# EAGLE board RoverBaseboard (EAGLE 6.4)
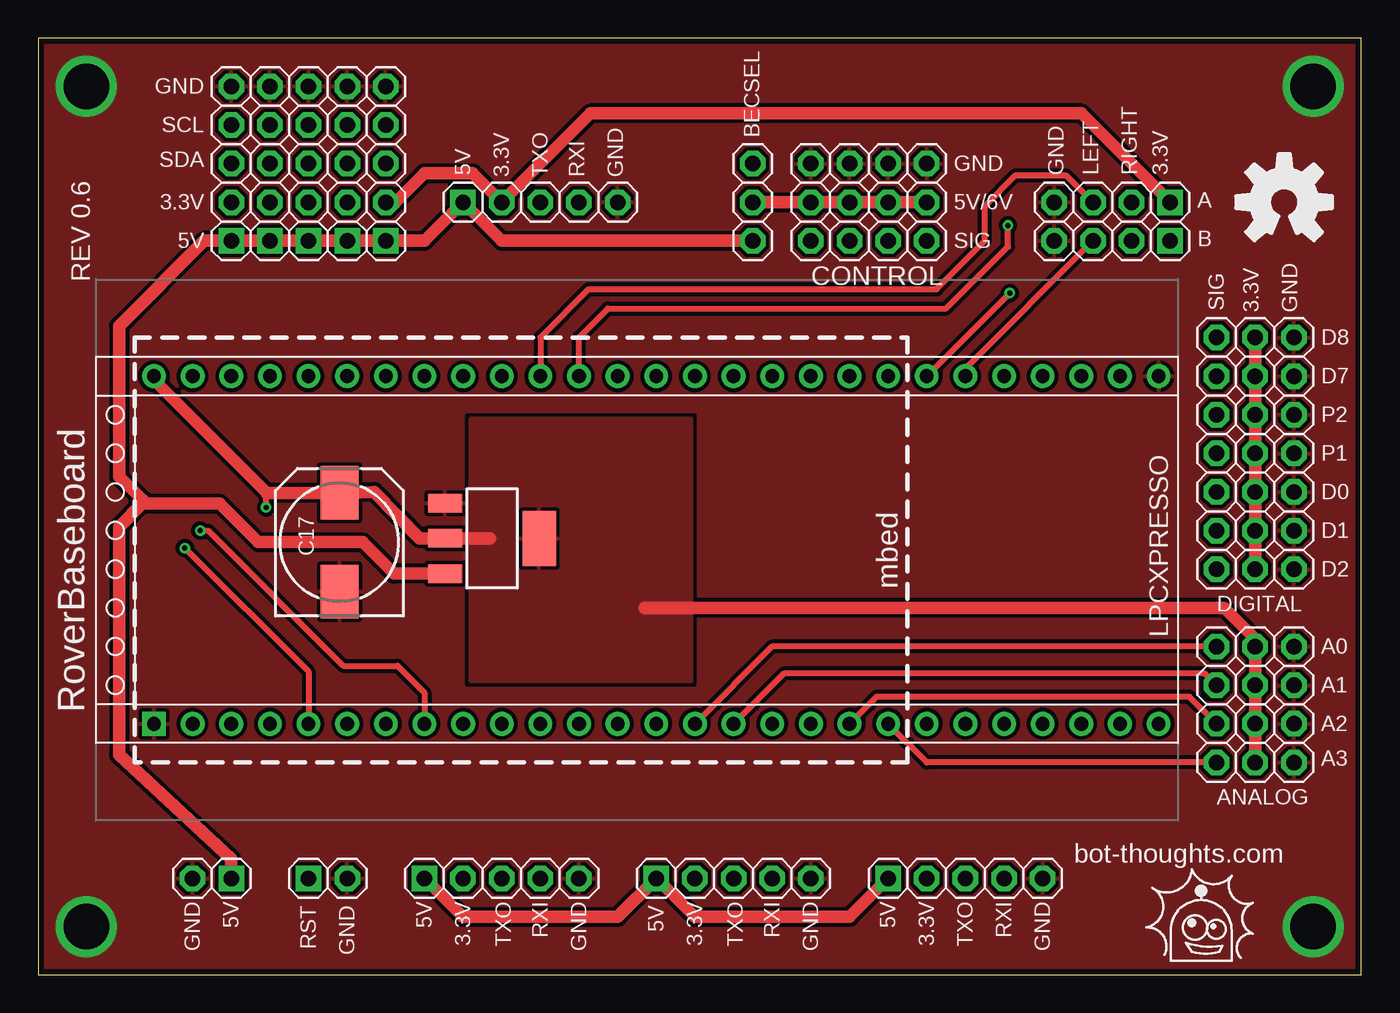
[diagram p0: board, top side]
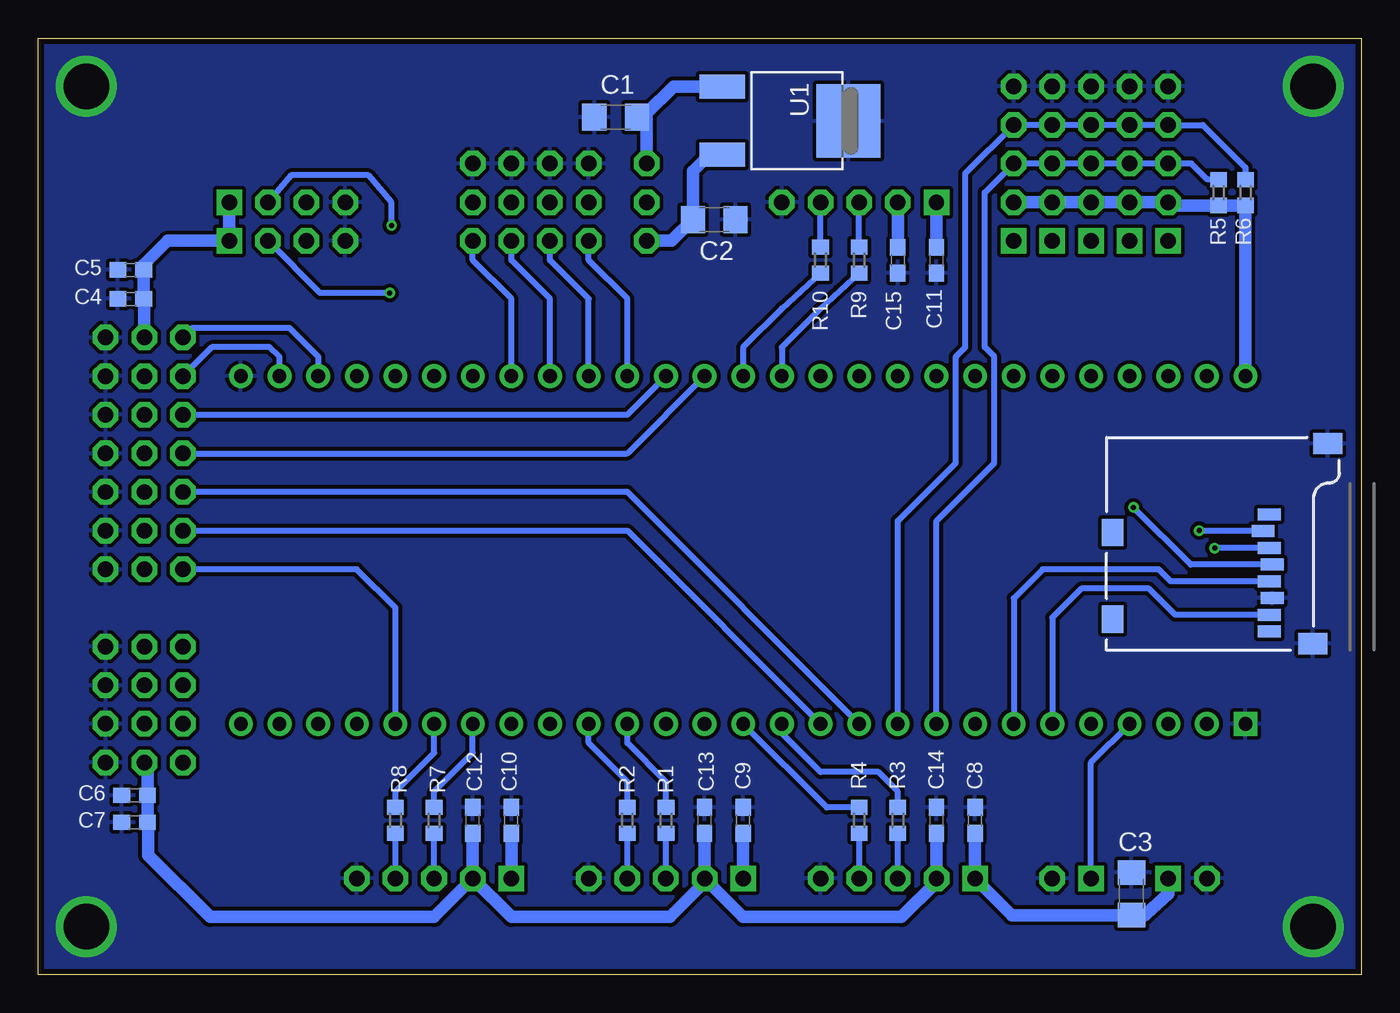
[diagram p1: board, bottom side, seen from below]

Size 87 x 61.59 mm. Coordinates in mm from the lower left corner, seen from the top.
Outline: 0,0 87,0 87,61.59 0,61.59 0,0
Copper layers (1*16): Top 0.0356mm / dielectric 1.5011mm / Bottom 0.0356mm
Design rules "default *": minimum track width 6mil, minimum drill 13mil, track to track 6mil, track to pad 6mil, pad to pad 6mil, via to via 6mil, smd to smd 6mil, copper to edge 15mil, drill to drill 6mil, minimum pad ring 13mil, minimum via ring 7mil, stop-mask expansion 4mil, vias tented up to drill 25mil, thermal gap 10mil

## Footprints (pad centres in the part's own frame; a part is rotated, then mirrored left to right if it is on the bottom)
1X03-S = drill 1.016 octagon: 1 -2.54,0; 2 0,0; 3 2.54,0
C1206 = smd 1.6 x 1.8: 1 -1.4,0; 2 1.4,0
C0603 = smd 1.1 x 1: 1 -0.85,0; 2 0.85,0
140CLH-0810 = smd 3.5 x 2.5: + 3.25,0; - -3.25,0
SOT223 = smd 1.219 x 2.235: 1 -2.311,-3.099; 2 0,-3.099; 3 2.311,-3.099 | smd 3.6 x 2.2: 4 0,3.099
1X04-S = drill 1.016 square: 1 -3.81,0 | drill 1.016 octagon: 2 -1.27,0; 3 1.27,0; 4 3.81,0
1X02-S = drill 1.016 square: 1 -1.27,0 | drill 1.016 octagon: 2 1.27,0
1X05-S = drill 1.016 square: 1 -5.08,0 | drill 1.016 octagon: 2 -2.54,0; 3 0,0; 4 2.54,0; 5 5.08,0
R0603 = smd 1 x 1.1: 1 -0.85,0; 2 0.85,0
DPAK = smd 1.6 x 2.997: 1 -2.261,-3.658; 3 2.21,-3.658 | smd 4.826 x 4.191: 4 0,4.623
MICRO-SD-SOCKET-PP = smd 0.8 x 1.5: 1 -8.94,10.7; 2 -7.84,10.3; 3 -6.74,10.7; 4 -5.64,10.9; 5 -4.54,10.7; 6 -3.44,10.9; 7 -2.34,10.7; 8 -1.24,10.7 | smd 1.8 x 1.4: CD1 -2.05,0.4; CD2 -7.75,0.4 | smd 1.4 x 1.9: GND1 -13.6,14.55; GND3 -0.45,13.55
LPCXPRESSO_NO_PAD = drill 0.9 pad 1.422 square: J6-1 -33.02,-11.43 | drill 0.9 pad 1.422: J6-2 -30.48,-11.43; J6-3 -27.94,-11.43; J6-4 -25.4,-11.43; J6-5 -22.86,-11.43; J6-6 -20.32,-11.43; J6-7 -17.78,-11.43; J6-8 -15.24,-11.43; J6-9 -12.7,-11.43; J6-10 -10.16,-11.43; J6-11 -7.62,-11.43; J6-12 -5.08,-11.43; J6-13 -2.54,-11.43; J6-14 0,-11.43; J6-15 2.54,-11.43; J6-16 5.08,-11.43; J6-17 7.62,-11.43; J6-18 10.16,-11.43; J6-19 12.7,-11.43; J6-20 15.24,-11.43; J6-21 17.78,-11.43; J6-22 20.32,-11.43; J6-23 22.86,-11.43; J6-24 25.4,-11.43; J6-25 27.94,-11.43; J6-26 30.48,-11.43; J6-27 33.02,-11.43; J6-28 -33.02,11.43; J6-29 -30.48,11.43; J6-30 -27.94,11.43; J6-31 -25.4,11.43; J6-32 -22.86,11.43; J6-33 -20.32,11.43; J6-34 -17.78,11.43; J6-35 -15.24,11.43; J6-36 -12.7,11.43; J6-37 -10.16,11.43; J6-38 -7.62,11.43; J6-39 -5.08,11.43; J6-40 -2.54,11.43; J6-41 0,11.43; J6-42 2.54,11.43; J6-43 5.08,11.43; J6-44 7.62,11.43; J6-45 10.16,11.43; J6-46 12.7,11.43; J6-47 15.24,11.43; J6-48 17.78,11.43; J6-49 20.32,11.43; J6-50 22.86,11.43; J6-51 25.4,11.43; J6-52 27.94,11.43; J6-53 30.48,11.43; J6-54 33.02,11.43

## Placement (x,y rotation side)
BECSEL  5V | 6V  [1X03-S]  46.99,50.8 270 top
C1  106  [C1206]  49.02,56.39 180 bottom
C2  106  [C1206]  42.55,49.66 0 bottom
C3  106  [C1206]  15.11,5.33 90 bottom
C4  106  [C0603]  80.9,44.45 180 bottom
C5  104  [C0603]  80.9,46.35 180 bottom
C6  106  [C0603]  80.64,11.81 180 bottom
C7  104  [C0603]  80.64,10.03 180 bottom
C8  106  [C0603]  25.4,10.16 90 bottom
C9  106  [C0603]  40.64,10.16 90 bottom
C10  106  [C0603]  55.88,10.16 90 bottom
C11  106  [C0603]  27.94,46.99 270 bottom
C12  106  [C0603]  58.42,10.16 90 bottom
C13  106  [C0603]  43.18,10.16 90 bottom
C14  106  [C0603]  27.94,10.16 90 bottom
C15  106  [C0603]  30.48,46.99 270 bottom
C17  33uF  [140CLH-0810]  19.81,28.45 90 top
IC3  3.3V  [SOT223]  29.84,28.7 270 top
JP1  IO  [1X03-S]  80.01,31.75 0 top
JP2  ENCODERS  [1X04-S]  70.61,48.26 180 top
JP3  POWER  [1X02-S]  11.43,6.35 180 top
JP4  RST  [1X02-S]  19.05,6.35 0 top
JP5  RXSPD  [1X03-S]  50.8,50.8 90 top
JP6  RXSTR  [1X03-S]  53.34,50.8 90 top
JP7  UART0  [1X05-S]  60.96,6.35 0 top
JP8  SPEED  [1X03-S]  55.88,50.8 90 top
JP9  STEER  [1X03-S]  58.42,50.8 90 top
JP10  PWM  [1X03-S]  80.01,34.29 0 top
JP11  PWM  [1X03-S]  80.01,36.83 0 top
JP13  IO  [1X03-S]  80.01,29.21 0 top
JP14  DIGITAL  [1X03-S]  80.01,26.67 0 top
JP15  ENCODERS  [1X04-S]  70.61,50.8 180 top
JP16  ADC  [1X03-S]  80.01,21.59 0 top
JP17  ADC  [1X03-S]  80.01,19.05 0 top
JP18  ADC  [1X03-S]  80.01,16.51 0 top
JP19  ADC  [1X03-S]  80.01,13.97 0 top
JP20  UART1  [1X05-S]  30.48,6.35 0 top
JP21  UART2  [1X05-S]  33.02,50.8 0 top
JP22  UART3  [1X05-S]  45.72,6.35 0 top
JP23  I2C  [1X05-S]  12.7,53.34 90 top
JP24  [1X05-S]  15.24,53.34 90 top
JP25  [1X05-S]  17.78,53.34 90 top
JP26  [1X05-S]  20.32,53.34 90 top
JP27  [1X05-S]  22.86,53.34 90 top
JP28  DIGITAL  [1X03-S]  80.01,39.37 0 top
JP29  DIGITAL  [1X03-S]  80.01,41.91 0 top
R1  10K  [R0603]  45.72,10.16 270 bottom
R2  10K  [R0603]  48.26,10.16 270 bottom
R3  10K  [R0603]  30.48,10.16 270 bottom
R4  10K  [R0603]  33.02,10.16 270 bottom
R5  2.2K  [R0603]  9.4,51.44 270 bottom
R6  2.2K  [R0603]  7.62,51.44 270 bottom
R7  10K  [R0603]  60.96,10.16 270 bottom
R8  10K  [R0603]  63.5,10.16 270 bottom
R9  10K  [R0603]  33.02,46.99 90 bottom
R10  10K  [R0603]  35.56,46.99 90 bottom
U1  LD29150DT50R  [DPAK]  38.35,56.13 270 bottom
U2  microSD  [MICRO-SD-SOCKET-PP]  16.76,21.34 270 bottom
U$1  LPCXPRESSO  [LPCXPRESSO_NO_PAD]  40.64,27.94 0 top

## Library data of the parts
BECSEL JP7 JP20-JP27 = pinhead-2
C1-C15 C17 = rcl
IC3 U2 = SparkFun
JP1 JP2 JP4-JP6 JP8-JP11 JP13-JP19 JP28 JP29 = pinhead-2; OC_NEWARK: unknown
JP3 = pinhead-2; DATABASE: ./../../../eagle/PARTSDB.TXT; OC_NEWARK: unknown
R1-R4 R7 R8 = rcl; MPN: WCR0805-220RFI; OC_NEWARK: 98K2621
R5 R6 = rcl; OC_NEWARK: unknown
R9 R10 = rcl; DATABASE: ./../../../eagle/PARTSDB.TXT; MPN: WCR0805-220RFI; OC_NEWARK: 98K2621
U1 = bt_regulator
U$1 = LPCXpresso

## Nets
!CS1: U2.2 U$1.J6-8
!ISP: U$1.J6-51
!RESET: JP4.1 U$1.J6-4
+3V3: C4.1 C5.1 C6.1 C7.1 C12.1 C13.1 C14.1 C15.1 C17.+ IC3.2 IC3.4 JP1.2 JP2.1 JP7.2 JP10.2 JP11.2 JP13.2 JP14.2 JP15.1 JP16.2 JP17.2 JP18.2 JP19.2 JP20.2 JP21.2 JP22.2 JP23.2 JP24.2 JP25.2 JP26.2 JP27.2 JP28.2 JP29.2 R5.2 R6.2 U2.4 U$1.J6-28
+5V: BECSEL.3 C2.1 C3.1 C8.1 C9.1 C10.1 C11.1 IC3.3 JP3.1 JP7.1 JP20.1 JP21.1 JP22.1 JP23.1 JP24.1 JP25.1 JP26.1 JP27.1 U1.3
A0: JP16.1 U$1.J6-15
A1: JP17.1 U$1.J6-16
A2: JP18.1 U$1.J6-19
A3: JP19.1 U$1.J6-20
BEC: BECSEL.2 JP5.2 JP6.2 JP8.2 JP9.2
D0: JP1.1 U$1.J6-11
D1: JP13.1 U$1.J6-12
D2: JP14.1 U$1.J6-23
D3: U$1.J6-24
D4: U$1.J6-25
D5: U$1.J6-26
D6: U$1.J6-27
D7: JP28.1 U$1.J6-53
D8: JP29.1 U$1.J6-52
D9: U$1.J6-50
ENC0: JP15.3 U$1.J6-38
ENC1: JP15.2 U$1.J6-39
ENC2: JP2.2 U$1.J6-48
ENC3: JP2.3 U$1.J6-49
GND: C1.2 C2.2 C3.2 C4.2 C5.2 C6.2 C7.2 C8.2 C9.2 C10.2 C11.2 C12.2 C13.2 C14.2 C15.2 C17.- IC3.1 JP1.3 JP2.4 JP3.2 JP4.2 JP5.3 JP6.3 JP7.5 JP8.3 JP9.3 JP10.3 JP11.3 JP13.3 JP14.3 JP15.4 JP16.3 JP17.3 JP18.3 JP19.3 JP20.5 JP21.5 JP22.5 JP23.5 JP24.5 JP25.5 JP26.5 JP27.5 JP28.3 JP29.3 U1.4 U2.6 U2.GND1 U2.GND3 U$1.J6-1 U$1.J6-54
MISO1: U2.7 U$1.J6-6
MOSI1: U2.3 U$1.J6-5
N$1: JP22.3 R1.2
N$2: JP22.4 R2.2
N$6: JP7.3 R7.2
N$7: JP7.4 R8.2
N$9: JP20.3 R3.2
N$10: JP20.4 R4.2
N$16: JP21.3 R9.2
N$17: JP21.4 R10.2
PWM1: JP10.1 U$1.J6-42
PWM2: JP11.1 U$1.J6-43
RXD0: R8.1 U$1.J6-22
RXD1: R4.1 U$1.J6-14
RXD2: R10.1 U$1.J6-41
RXD3: R2.1 U$1.J6-18
RXSPD: JP5.1 U$1.J6-44
RXSTR: JP6.1 U$1.J6-45
SCK1: U2.5 U$1.J6-7
SCL: JP23.4 JP24.4 JP25.4 JP26.4 JP27.4 R6.1 U$1.J6-10
SDA: JP23.3 JP24.3 JP25.3 JP26.3 JP27.3 R5.1 U$1.J6-9
SPEED: JP8.1 U$1.J6-46
STEER: JP9.1 U$1.J6-47
TXD0: R7.1 U$1.J6-21
TXD1: R3.1 U$1.J6-13
TXD2: R9.1 U$1.J6-40
TXD3: R1.1 U$1.J6-17
VBEC: BECSEL.1 C1.1 U1.1

## Tracks (layer width: path | path; a pad name or v marks a point on that pad's centre or on a via)
!CS1  (via drill 0.33)
  Top 0.406: v10.67,29.21 11.18,29.21 20.07,20.32 23.62,20.32 25.4,18.54 U$1.J6-8
  Bottom 0.406: U2.2 10.63,29.18 v10.67,29.21
!RESET
  Bottom 0.406: JP4.1 17.78,13.97 U$1.J6-4
+3V3  (via drill 0.33)
  Top 0.406: v14.99,30.73 14.99,31.75
  Top 0.813: JP27.2 23.5,50.8 25.4,52.7 28.57,52.7 JP21.2 36.32,56.64 68.58,56.64 JP15.1 | JP29.2 JP28.2 JP11.2 JP10.2 JP1.2 JP13.2 JP14.2 | JP19.2 JP18.2 JP17.2 JP16.2 80.01,22.1 77.98,24.13 39.88,24.13 | U$1.J6-28 7.62,39.12 14.99,31.75 15.04,31.7 C17.+ 20.37,31.7 22.1,31.75 25.09,28.7 IC3.2 29.72,28.7
  Bottom 0.406: U2.4 11.23,26.98 v14.99,30.73
  Bottom 0.813: JP27.2 JP26.2 JP25.2 JP24.2 JP23.2 12.48,50.59 R5.2 R6.2 U$1.J6-28 | C14.1 JP20.2 27.94,6.1 30.23,3.81 40.64,3.81 JP22.2 | C12.1 JP7.2 | C15.1 JP21.2 | JP29.2 80.01,44.41 C4.1 C5.1 80.05,46.7 78.49,48.26 JP2.1 JP15.1 | JP19.2 79.8,13.76 C6.1 C7.1 79.76,9.99 79.76,7.87 75.69,3.81 60.96,3.81 JP7.2 | C13.1 JP22.2 | JP22.2 43.18,6.1 45.47,3.81 55.88,3.81 JP7.2
  pour Top (isolate 0.254): 28.45,36.58 42.93,36.58 42.93,19.3 28.45,19.3
+5V
  Top 0.813: JP20.1 27.94,3.81 38.1,3.81 JP22.1 43.18,3.81 53.34,3.81 JP7.1 | 6.86,31.24 5.33,32.77 5.33,42.67 10.92,48.26 JP23.1 JP24.1 JP25.1 JP26.1 JP27.1 25.4,48.26 JP21.1 30.48,48.26 BECSEL.3 | 6.86,31.24 7.11,30.99 11.94,30.99 14.48,28.45 21.34,28.45 23.39,26.39 IC3.3 | 6.86,31.24 6.86,30.99 5.33,29.46 5.33,14.48 12.7,7.62 JP3.1
  Bottom 0.813: C8.1 JP20.1 22.98,3.93 C3.1 14.22,3.93 14.09,4.06 12.7,5.33 JP3.1 | C9.1 JP22.1 | C10.1 JP7.1 | C11.1 JP21.1 | U1.3 42.09,53.85 42.93,53.85 43.95,52.83 C2.1 45.34,48.26 BECSEL.3
A0
  Top 0.406: JP16.1 48.26,21.59 U$1.J6-15
A1
  Top 0.406: JP17.1 76.71,19.81 49.02,19.81 U$1.J6-16
A2
  Top 0.406: JP18.1 75.69,18.29 55.12,18.29 U$1.J6-19
A3
  Top 0.406: JP19.1 58.42,13.97 U$1.J6-20
BEC
  Top 0.813: JP9.2 JP8.2 JP6.2 JP5.2 BECSEL.2
D0
  Bottom 0.406: U$1.J6-11 48.26,31.75 JP1.1
D1
  Bottom 0.406: JP13.1 48.26,29.21 U$1.J6-12
D2
  Bottom 0.406: U$1.J6-23 63.5,24.13 66.04,26.67 JP14.1
D7
  Bottom 0.406: U$1.J6-53 71.12,40.64 71.75,41.27 75.56,41.27 JP28.1
D8
  Bottom 0.406: JP29.1 76.83,42.55 70.48,42.55 68.58,40.64 U$1.J6-52
ENC0
  Top 0.406: U$1.J6-38 33.02,41.91 36.2,45.09 59.05,45.09 62.23,48.26 62.23,50.55 64.26,52.58 67.56,52.58 JP15.3
ENC1  (via drill 0.33)
  Top 0.406: U$1.J6-39 35.56,41.91 37.47,43.81 59.69,43.81 63.75,47.88 v63.75,49.28
  Bottom 0.406: v63.75,49.28 63.75,50.8 65.28,52.58 70.36,52.58 JP15.2
ENC2  (via drill 0.33)
  Top 0.406: U$1.J6-48 v63.88,44.83
  Bottom 0.406: v63.88,44.83 68.45,44.83 JP2.2
ENC3
  Top 0.406: U$1.J6-49 60.96,39.88 JP2.3
GND  (via drill 3)
  other vias: 3.17,58.42 83.82,58.42 83.82,3.17 3.17,3.17
  pour Bottom (isolate 0.254, rank 3): 0,61.59 87,61.59 87,0 0,0
  pour Top (isolate 0.254, rank 2): 0,61.59 87,61.59 87,0 0,0
MISO1
  Bottom 0.406: U2.7 12.25,23.68 13.97,25.4 18.41,25.4 20.32,23.5 U$1.J6-6
MOSI1  (via drill 0.33)
  Top 0.406: v9.65,28.07 17.78,19.94 U$1.J6-5
  Bottom 0.406: U2.3 8.37,28.08 v9.65,28.07
N$1
  Bottom 0.406: JP22.3 R1.2
N$2
  Bottom 0.406: JP22.4 R2.2
N$6
  Bottom 0.406: JP7.3 R7.2
N$7
  Bottom 0.406: JP7.4 R8.2
N$9
  Bottom 0.406: JP20.3 R3.2
N$10
  Bottom 0.406: R4.2 JP20.4
N$16
  Bottom 0.406: R9.2 JP21.3
N$17
  Bottom 0.406: R10.2 JP21.4
PWM1
  Bottom 0.406: JP10.1 48.26,34.29 U$1.J6-42
PWM2
  Bottom 0.406: JP11.1 48.26,36.83 U$1.J6-43
RXD0
  Bottom 0.406: R8.1 63.5,12.06 60.96,14.61 U$1.J6-22
RXD1
  Bottom 0.406: R4.1 35.14,11.01 U$1.J6-14
RXD2
  Bottom 0.406: R10.1 38.1,43.81 40.64,41.27 U$1.J6-41
RXD3
  Bottom 0.406: R2.1 48.26,12.7 50.8,15.24 U$1.J6-18
RXSPD
  Bottom 0.406: U$1.J6-44 48.26,44.45 50.8,46.99 JP5.1
RXSTR
  Bottom 0.406: U$1.J6-45 50.8,44.45 53.34,46.99 JP6.1
SCK1
  Bottom 0.406: U2.5 12.54,25.88 13.34,26.67 20.95,26.67 22.86,24.77 U$1.J6-7
SCL
  Bottom 0.406: U$1.J6-10 30.48,29.84 26.67,33.66 26.67,40.64 26.04,41.27 26.04,52.7 JP27.4 JP26.4 JP25.4 JP24.4 JP23.4 10.41,55.88 7.62,53.09 R6.1
SDA
  Bottom 0.406: R5.1 10.12,52.28 11.18,53.34 JP23.3 JP24.3 JP25.3 JP26.3 JP27.3 24.77,51.44 24.77,41.27 24.13,40.64 24.13,33.66 27.94,29.84 U$1.J6-9
SPEED
  Bottom 0.406: U$1.J6-46 53.34,44.45 55.88,46.99 JP8.1
STEER
  Bottom 0.406: U$1.J6-47 55.88,44.45 58.42,46.99 JP9.1
TXD0
  Bottom 0.406: R7.1 60.96,12.06 58.42,14.61 U$1.J6-21
TXD1
  Bottom 0.406: R3.1 30.48,12.06 31.75,13.34 35.56,13.34 38.1,15.88 U$1.J6-13
TXD2
  Bottom 0.406: R9.1 35.56,43.81 38.1,41.27 U$1.J6-40
TXD3
  Bottom 0.406: R1.1 45.72,12.7 48.26,15.24 U$1.J6-17
VBEC
  Bottom 0.813: U1.1 45.24,58.4 46.99,56.64 46.99,56.39 | 46.99,56.39 BECSEL.1 | C1.1 46.99,56.39

## Text on the board
tPlace: mbed
tNames: GND | SCL | SDA | 5V | GND | GND | LEFT | RIGHT | 3.3V | 3.3V | TXO | RXI | GND | 3.3V | 5V/6V | A | 5V | SIG | B | REV 0.6 | CONTROL | SIG | 3.3V | GND | D8 | D7 | P2 | P1 | D0 | D1 | D2 | DIGITAL | A0 | A1 | RoverBaseboard | A2 | A3 | ANALOG | bot-thoughts.com | GND | 5V | RST | GND | 5V | 3.3V | TXO | RXI | GND | 5V | 3.3V | TXO | RXI | GND | 5V | 3.3V | TXO | RXI | GND
tsilk: GND | SCL | 5V | 6V | BECSEL | RXSPD | RXSTR | SPEED | STEER | SDA | 5V | GND | GND | LEFT | RIGHT | 3.3V | REV 0.5 | 3.3V | TXO | RXI | GND | 3.3V | 5V/6V | 5V | UART2 | 7805 | SIG | I2C | CONTROL | ENCODERS | D8 | D7 | P2 | P1 | 3.3V | D0 | C17 | D1 | D2 | mbed | A0 | LPCXPRESSO | A1 | A2 | RoverBaseboard | A3 | SIG | 3.3V | GND | POWER | RST | UART1 | UART3 | UART0 | bot-thoughts.com | GND | 5V | RST | GND | 5V | 3.3V | TXO | RXI | GND | 5V | 3.3V | TXO | RXI | GND | 5V | 3.3V | TXO | RXI | GND
bsilk: C1 | R6 | R5 | C3 | C5 | C11 | C15 | R9 | R10 | C4 | microSD | C6 | C7 | C8 | C14 | R3 | R4 | C9 | C13 | R1 | R2 | C10 | C12 | R7 | R8 | C16 | C2